# Altium PCB Sheet1.PcbDoc
Units mil, origin at the board's own origin, x right, y up, seen from the top; angles counter-clockwise.
Board outline 3935 x 2745 mil, 2 copper layers (Top Layer, Bottom Layer); 24 components, 47 nets, 120 pads, 0 vias.
Unrouted connection lines stored in the file: 60.
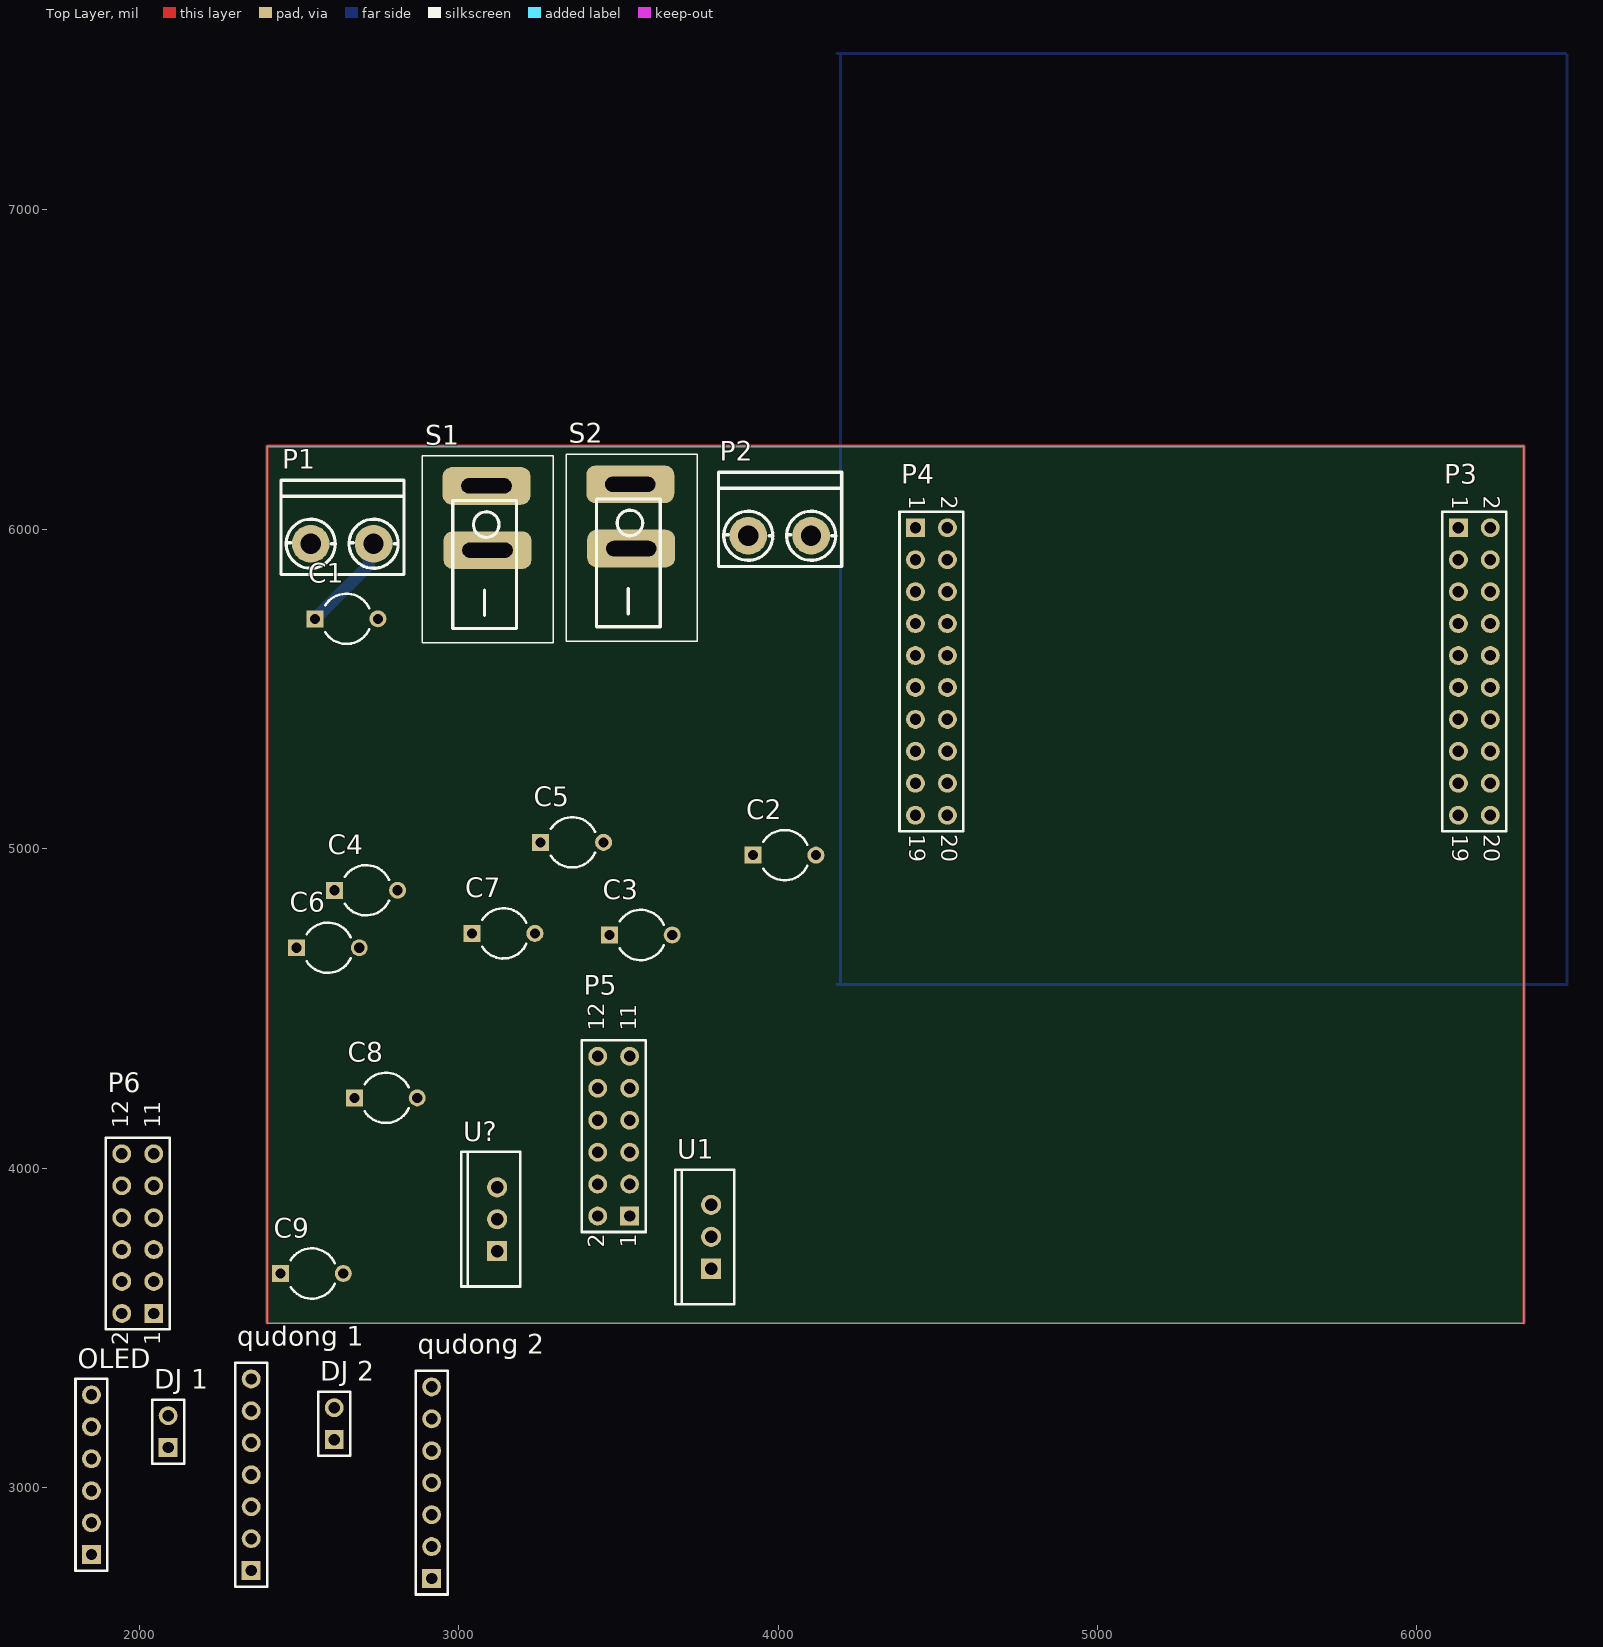
[diagram p0: Top Layer view]
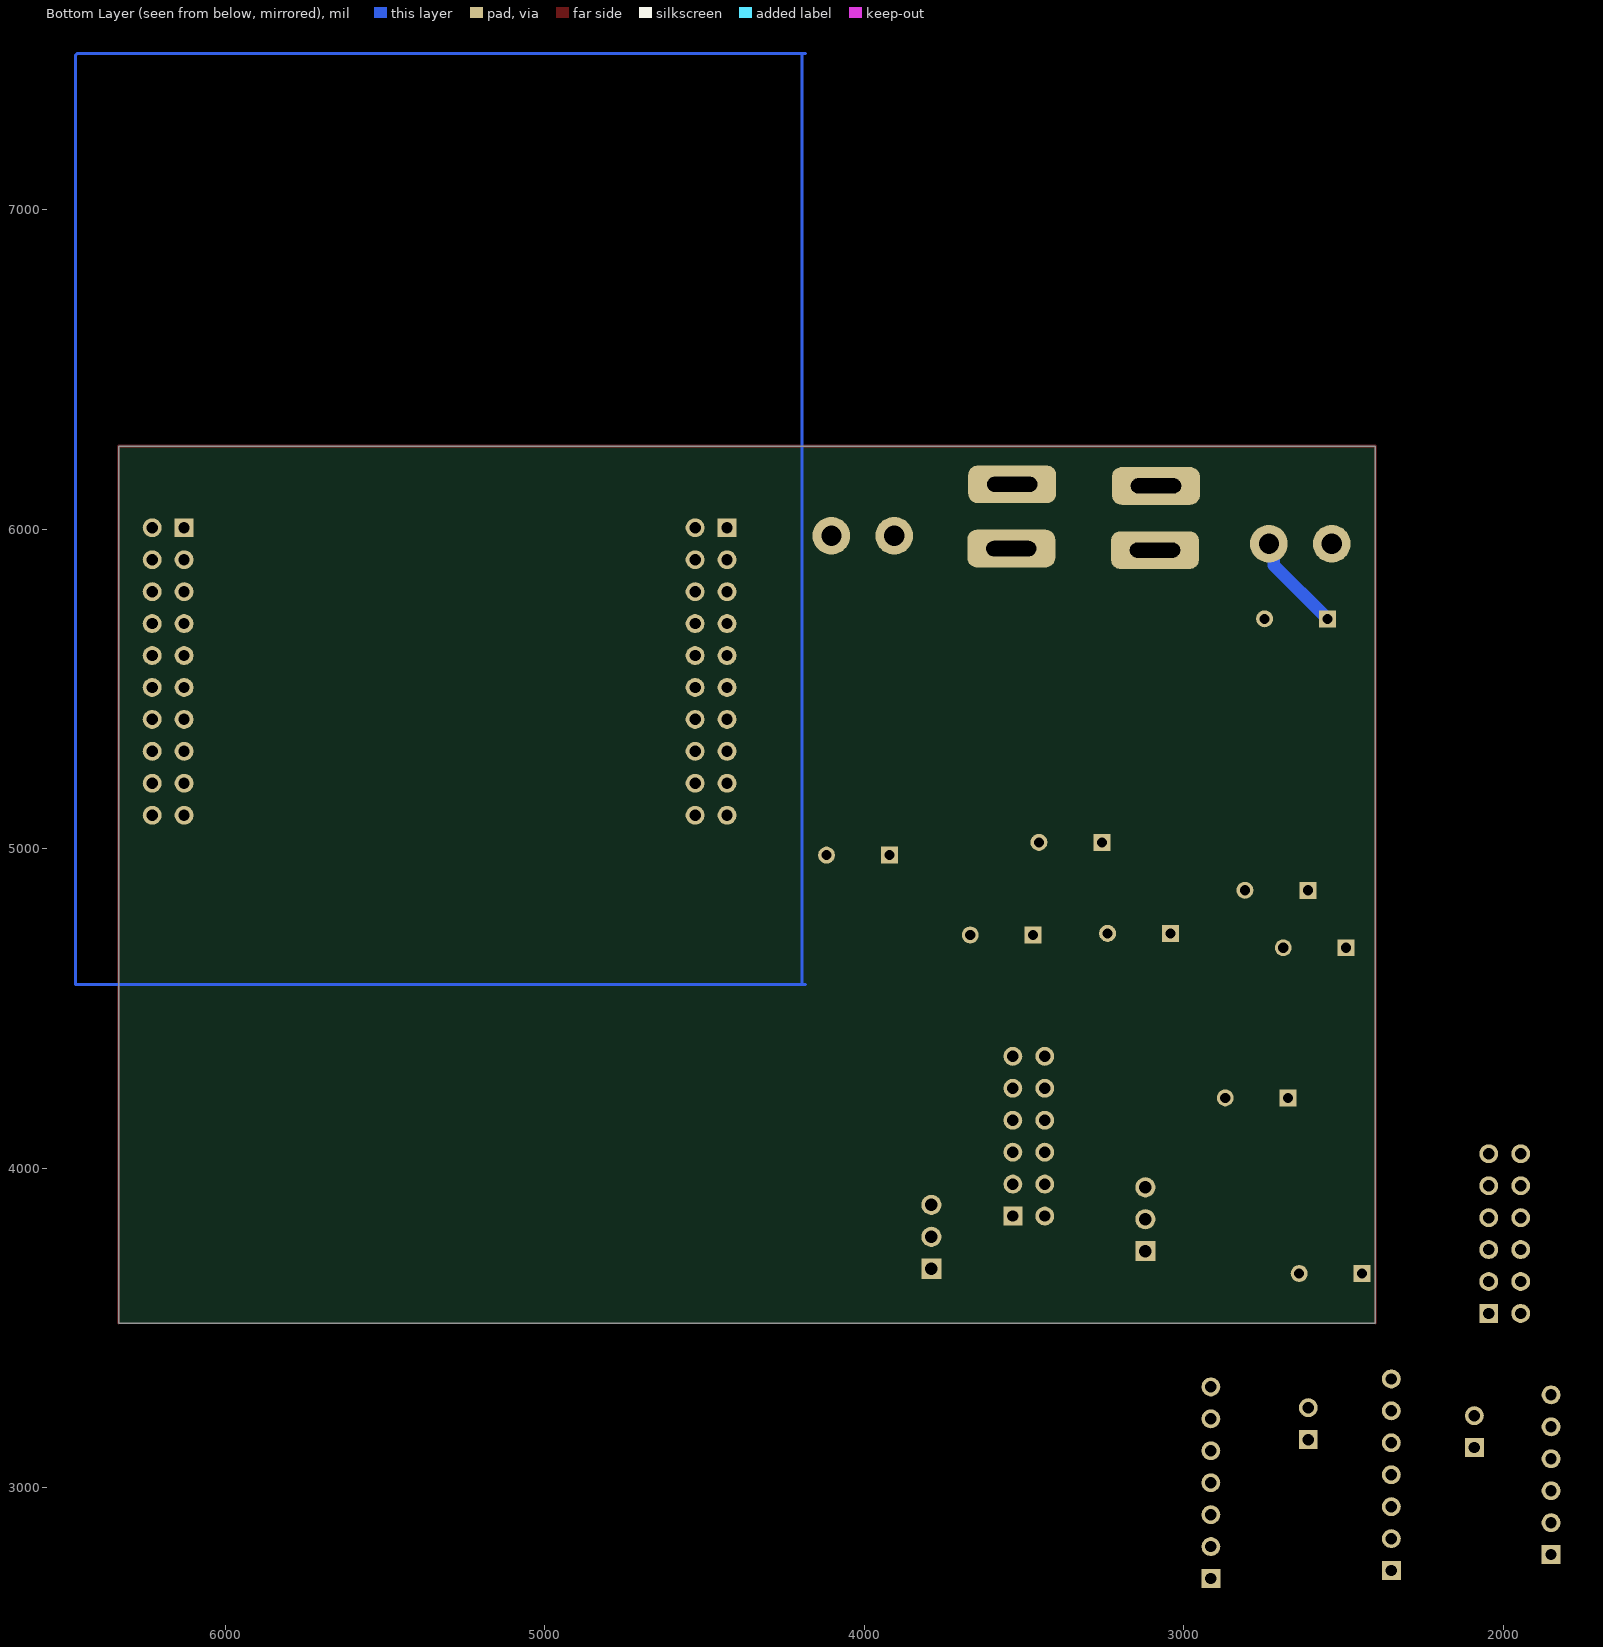
[diagram p1: Bottom Layer view, seen from below]

## Layer stack, top to bottom
Top Solder: solder mask 0.4, Solder Resist, Dk 3.5
Top Layer: signal copper 1.4
Dielectric 1: dielectric 12.6, FR-4, Dk 4.8
Bottom Layer: signal copper 1.4
Bottom Solder: solder mask 0.4, Solder Resist, Dk 3.5

## Board outline
2400,3515 2400,6260 6335,6260 6335,3515

## Design rules (kind name [scope] priority, off if disabled: settings)
Clearance [All] p1: gap=10 ignorepadtopadclearanceinfootprint=FALSE except(0: Arc-Hole Track-Hole SMDPad-Hole THPad-Hole Via-Hole Fill-Hole Poly-Hole Region-Hole Text-Hole)
PolygonConnect [All] p1: connectstyle=Relief reliefconductorwidth=10 reliefentries=4 polygonreliefangle="90 Angle" airgapwidth=10
RoutingVias [All] p1: holewidth=28 width=50 viastyle="Through Hole" minholewidth=28 minwidth=50 maxholewidth=28 maxwidth=50
SolderMaskExpansion [All] p1: expansion=4
Width [All] p1: maxlimit=40 minlimit=30 preferedwidth=40
30 further rules are at their usual default settings.

## Components (designator, comment, footprint, x,y, rotation, side; value= is the part's Value field where it differs from the comment)
C1 "Cap" CAPR5-4X5 2648.43,5720 r0 top value=100pF
C2 "Cap Pol2" CAPR5-4X5 4020,4980 r0 top value=100pF
C3 "Cap" CAPR5-4X5 3570,4730 r0 top value=100pF
C4 "Cap" CAPR5-4X5 2710,4870 r0 top value=100pF
C5 "Cap Pol2" CAPR5-4X5 3355,5020 r0 top value=100pF
C6 "Cap" CAPR5-4X5 2590,4690 r0 top value=100pF
C7 "Cap" CAPR5-4X5 3140,4735 r0 top value=100pF
C8 "Cap" CAPR5-4X5 2771.57,4220 r0 top value=100pF
C9 "Cap" CAPR5-4X5 2540,3670 r0 top value=100pF
"DJ 1" "Header 2" HDR2X1_A 2090,3125 r90 top
"DJ 2" "Header 2" HDR2X1_A 2610,3150 r90 top
OLED "Header 6" HDR1X6 1850,2790 r90 top
P1 "Header 2" "Con 2接线端子" 2635,5955 r0 top
P2 "Header 2" "Con 2接线端子" 4005,5980 r0 top
P3 "Header 10X2" HDR2X10 6130,6005 r270 top
P4 "Header 10X2" HDR2X10 4430,6005 r270 top
P5 "Header 6X2" HDR2X6 3535,3850 r90 top
P6 "Header 6X2" HDR2X6 2045,3545 r90 top
"qudong 1" "Header 7" HDR1X7 2350,2740 r90 top
"qudong 2" "Header 7" HDR1X7 2915,2715 r90 top
S1 "单刀开关" 船型开关（小2脚） 3085,5937 r90 top
S2 "单刀开关" 船型开关（小2脚） 3535,5942 r90 top
U1 "LM2940" T03B 3790,3785 r90 top
U? "U2" T03B 3120,3840 r90 top

## Footprints (in the part's own frame and the unit in brackets; to place one, negate y for a bottom-side part, rotate by r counter-clockwise, add the part's x,y. Pads: shape width x height; smd on the part's side, far side on the other; paste and mask are expansions set on the pad)
CAPR5-4X5 [mm] "Capacitor; 2 Leads"
  rect 1.35x1.35 hole 0.8: 1(-2.5,0)
  round 1.35 hole 0.8: 2(2.5,0)
  silkscreen extent -1.69,-2 1.82,2
"Con 2接线端子" [mm]
  round 3 hole 1.6: 0(-2.5,0) 1(2.5,0)
  silkscreen extent -4.88,-2.44 4.93,5.05
HDR1X6 [mm] "Connector; Header; 6 Position"
  rect 1.5x1.5 hole 0.9: 1(0,0)
  round 1.5 hole 0.9: 2(2.54,0) 3(5.08,0) 4(7.62,0) 5(10.16,0) 6(12.7,0)
  silkscreen extent -1.27,-1.27 13.97,1.27
HDR1X7 [mm] "Connector; Header; 7 Position"
  rect 1.5x1.5 hole 0.9: 1(0,0)
  round 1.5 hole 0.9: 2(2.54,0) 3(5.08,0) 4(7.62,0) 5(10.16,0) 6(12.7,0) 7(15.24,0)
  silkscreen extent -1.27,-1.27 16.51,1.27
HDR2X1_A [mm] "Connector; Header; 2 Position"
  rect 1.5x1.5 hole 0.9: 1(0,0)
  round 1.5 hole 0.9: 2(2.54,0)
  silkscreen extent -1.27,-1.27 3.81,1.27
HDR2X6 [mm] "Connector; Header; 6x2 Position"
  rect 1.5x1.5 hole 0.9: 1(0,0)
  round 1.5 hole 0.9: 2(0,2.54) 3(2.54,0) 4(2.54,2.54) 5(5.08,0) 6(5.08,2.54) 7(7.62,0) 8(7.62,2.54) 9(10.16,0) 10(10.16,2.54) 11(12.7,0) 12(12.7,2.54)
  silkscreen extent -1.27,-1.27 13.97,3.81
HDR2X10 [mm] "Connector; Header; 10x2 Position"
  rect 1.5x1.5 hole 0.9: 1(0,0)
  round 1.5 hole 0.9: 2(0,2.54) 3(2.54,0) 4(2.54,2.54) 5(5.08,0) 6(5.08,2.54) 7(7.62,0) 8(7.62,2.54) 9(10.16,0) 10(10.16,2.54) 11(12.7,0) 12(12.7,2.54) 13(15.24,0) 14(15.24,2.54) 15(17.78,0) 16(17.78,2.54) 17(20.32,0) 18(20.32,2.54) 19(22.86,0) 20(22.86,2.54)
  silkscreen extent -1.27,-1.27 24.13,3.81
T03B [mm] "TO, Thru-Hole, Vertical, Heatsink Mounted; 3 In-Line Leads; Pitch 2.54 mm"
  rect 1.6x1.6 hole 1: 1(-2.54,0)
  round 1.6 hole 1: 2(0,0) 3(2.54,0)
  silkscreen extent -5.35,-1.85 5.35,2.85
船型开关（小2脚） [mm]
  rrect50% 3x7 hole 1.2 slot 4 at 90 deg: 1(5.055,-0.051) 2(-0.051,-0.127)
  silkscreen extent -7.42,-5.36 7.44,5.05, body extent -7.49,-5.4 7.57,5.1, height 14.51

## Part data
C1 C3 C4 C6 C7 C8 C9: "Capacitor", LatestRevisionDate=17-Jul-2002, LatestRevisionNote="Re-released for DXP Platform.", PackageDescription="Radial Cap, Thru-Hole; 2 Leads; 0.3 in Pin Spacing", PackageReference=RAD-0.3, Published=8-Jun-2000, Publisher="Altium Limited"
C2 C5: "Polarized Capacitor (Axial)", LatestRevisionDate=17-Jul-2002, LatestRevisionNote="Re-released for DXP Platform.", PackageDescription="Polarized Capacitor; 2 Leads", PackageReference=POLAR0.8, Published=8-Jun-2000, Publisher="Altium Limited"
"DJ 1" "DJ 2": "接插件", LatestRevisionDate=17-Jul-2002, LatestRevisionNote="Re-released for DXP Platform.", Publisher="Altium Limited"
OLED: "Header, 6-Pin", LatestRevisionDate=17-Jul-2002, LatestRevisionNote="Re-released for DXP Platform.", Publisher="Altium Limited"
P1 P2: "Header, 2-Pin", LatestRevisionDate=17-Jul-2002, LatestRevisionNote="Re-released for DXP Platform.", Publisher="Altium Limited"
P3 P4: "Header, 10-Pin, Dual row", LatestRevisionDate=17-Jul-2002, LatestRevisionNote="Re-released for DXP Platform.", Publisher="Altium Limited"
P5 P6: "Header, 6-Pin, Dual row", LatestRevisionDate=17-Jul-2002, LatestRevisionNote="Re-released for DXP Platform.", Publisher="Altium Limited"
"qudong 1" "qudong 2": "Header, 7-Pin", LatestRevisionDate=17-Jul-2002, LatestRevisionNote="Re-released for DXP Platform.", Publisher="Altium Limited"
U?: library part ASM1117, "ASM1117系列SOT-223封装稳压芯片"

## Nets (pads, with @x,y where several pads share a name; then routed paths per layer and width w, separated by ;. In a path a pad name is that pad's centre, name@x,y a point inside that pad or via, vN(x,y) a via of type N, cw(c..) or ccw(c..) an arc to the next point about the centre after c; other vN are vias at no path point)
3.3V: C8.2 C9.2 P3.1 P6.2 P6.4 P6.6 P6.8 P6.10 P6.12 U?.2
7.2V: C2.1 C3.2 S1.2 S2.1 U1.1
+5: "qudong 1.3" "qudong 2.3" C4.2 C5.1 C6.2 C7.2 P3.2 P5.2 P5.4 P5.6 P5.8 P5.10 P5.12 U1.3 U?.3
GND: "qudong 1.1" "qudong 2.1" C1.1 C2.2 C3.1 C4.1 C5.2 C6.1 C7.1 C8.1 C9.1 OLED.6 P1.1 P3.4 P4.2 P5.1 P5.3 P5.5 P5.7 P5.9 P5.11 P6.1 P6.3 P6.5 P6.7 P6.9 P6.11 U1.2 U?.1 | length 311
  Bottom Layer w40: C1.1 2718.48,5888.48 2718.48,5940.05 P1.1
NetC1_2: C1.2 S1.1
"NetDJ 1_1": "DJ 1.1" "qudong 1.7"
"NetDJ 1_2": "DJ 1.2" "qudong 1.6"
"NetDJ 2_1": "DJ 2.1" "qudong 2.7"
"NetDJ 2_2": "DJ 2.2" "qudong 2.6"
NetP2_1: P2.1 S2.2
P1.2: P4.11
P1.3: P4.9
P1.4: P4.7
P1.5: P4.5
P1.6: P3.9
P2.0: P4.4
P2.2: P4.6
P2.3: P4.18
P2.4: P4.3
P2.5: P4.1
P2.6: P4.16
P2.7: P3.15
P3.0: P4.12
P3.1: P4.14
P3.2: P3.13
P3.3: P3.7
P3.4: P3.5
P3.5: P3.20
P3.6: P3.18
P3.7: P4.17
P4.0: P4.15
P4.1: P3.19
P4.2: P3.17
P4.3: P4.13
P6.0: P3.6
P6.1: P3.8
P6.2: P3.10
P6.3: P3.12
P6.4: P3.14
P6.5: P3.3
P6.6: P3.11
P7.0: P3.16
P7.4: P4.8
P8.1: P4.20
P8.2: P4.19
RST: P4.10
驱动: "qudong 1.2"
pads on no net: "qudong 1.4" "qudong 1.5" "qudong 2.2" "qudong 2.4" "qudong 2.5" OLED.1 OLED.2 OLED.3 OLED.4 OLED.5 P1.0 P2.0
copper on no net: | length 27289.1
  Top Layer w10: 2400,3515 2400,6260 6335,6260 6335,3515
  Bottom Layer w10: 4185,4575 6470,4575 ; 4195,7485 4195,4575 6470,4575 ; 6465,7490 6470,7485 ; 6465,7490 4185,7490 6465,7490 ; 6465,7490 6470,7485 ; 6470,4575 6470,7485 ; 6470,4575 6470,7485

## Text inside footprints (layer, text, board x,y; h text height)
P3: Top Overlay "20" at 6210,5045 h50 r270; Top Overlay "19" at 6110,5045 h50 r270; Top Overlay "1" at 6110,6105 h50 r270; Top Overlay "2" at 6210,6105 h50 r270
P4: Top Overlay "20" at 4510,5045 h50 r270; Top Overlay "19" at 4410,5045 h50 r270; Top Overlay "1" at 4410,6105 h50 r270; Top Overlay "2" at 4510,6105 h50 r270
P5: Top Overlay "12" at 3455,4430 h50 r90; Top Overlay "1" at 3555,4470 h50 r90; Top Overlay "1" at 3555,4430 h50 r90; Top Overlay "1" at 3555,3750 h50 r90; Top Overlay "2" at 3455,3750 h50 r90
P6: Top Overlay "12" at 1965,4125 h50 r90; Top Overlay "1" at 2065,4165 h50 r90; Top Overlay "1" at 2065,4125 h50 r90; Top Overlay "1" at 2065,3445 h50 r90; Top Overlay "2" at 1965,3445 h50 r90